# EAGLE board pi_zero_shield (EAGLE 9.6.2)
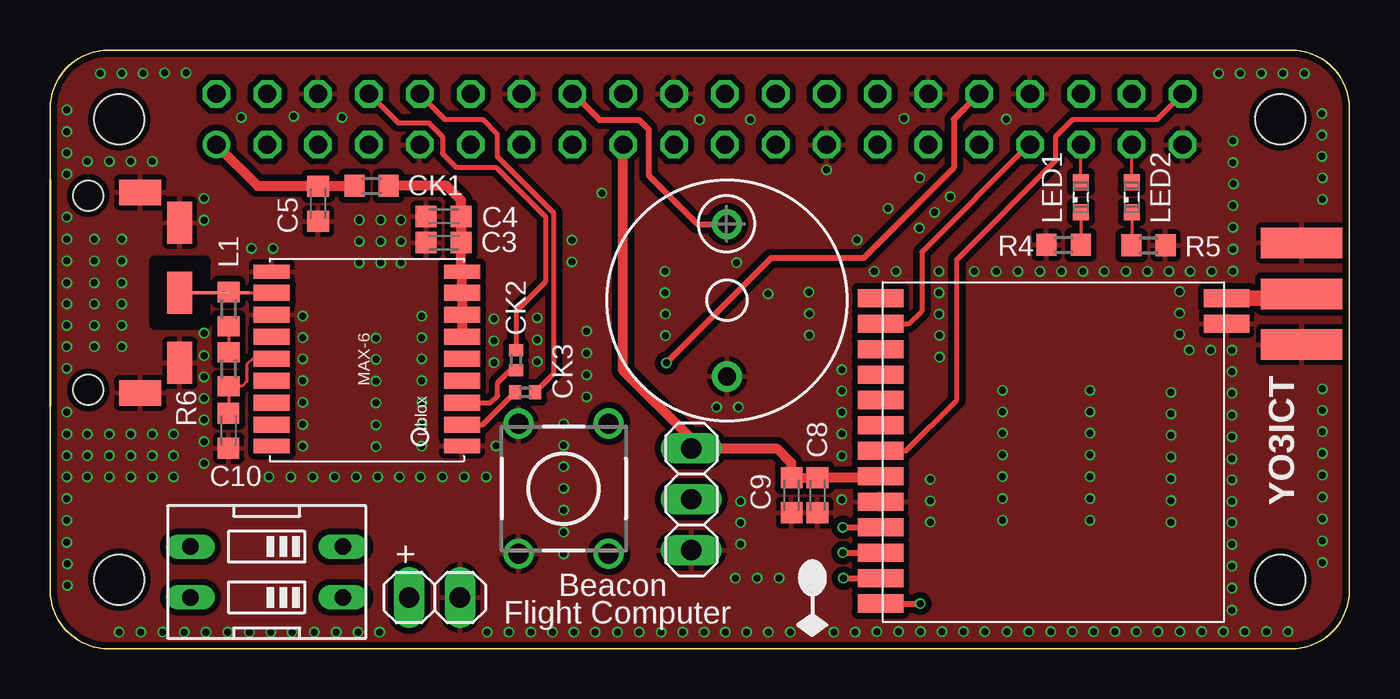
[diagram p0: board, top side]
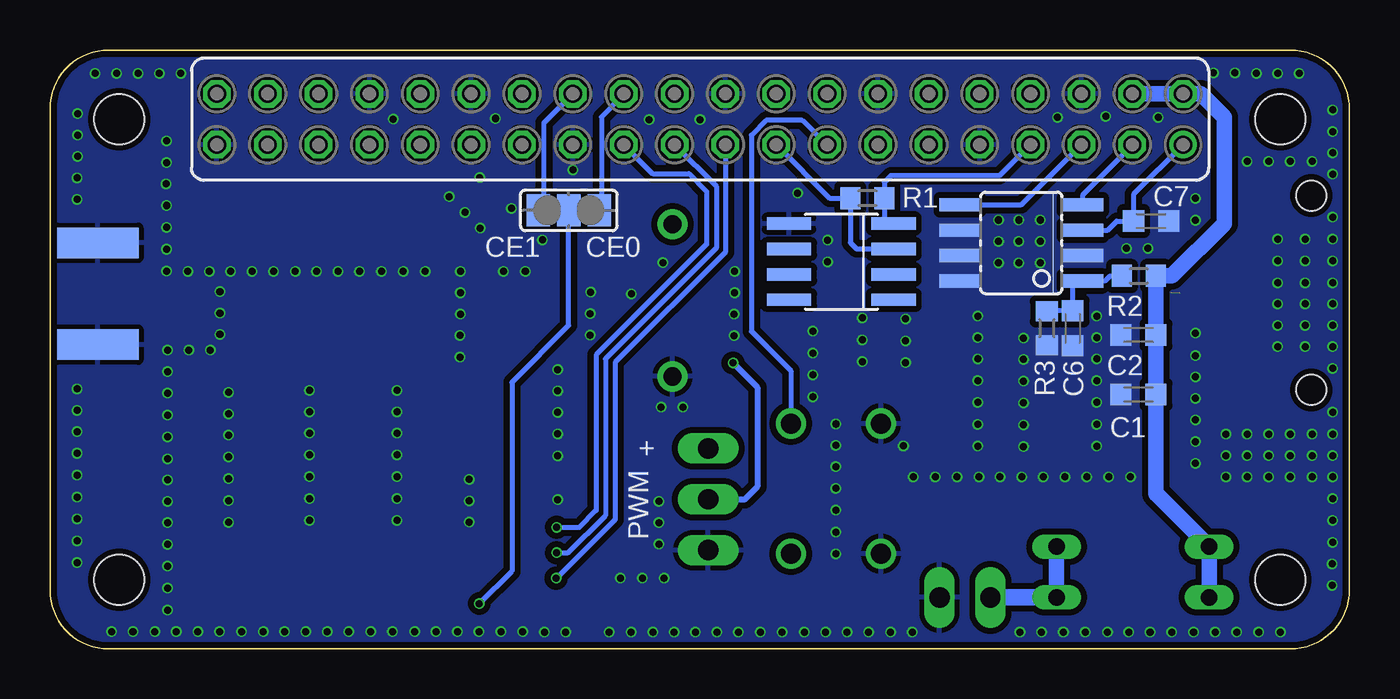
[diagram p1: board, bottom side, seen from below]

Size 64.9 x 29.9 mm. Coordinates in mm from the lower left corner, seen from the top.
Outline: 2.95,29.9 arc90 0,26.95 0,2.95 arc90 2.95,0 61.98,0 arc90 64.9,2.92 64.9,26.97 arc90 61.98,29.9 2.95,29.9
Copper layers (1*16): Top 0.035559375mm / dielectric 1.6mm / Bottom 0.035559375mm
Design rules "Arxterra-HLCpcb-2-layer-KW": minimum track width 6mil, minimum drill 0.3mm, track to track 6mil, track to pad 6mil, pad to pad 6mil, via to via 10mil, smd to smd 6mil, copper to edge 8mil, drill to drill 6mil, minimum pad ring 5mil, minimum via ring 3mil, stop-mask expansion 2.5mil, vias tented up to drill 25mil, thermal gap 10mil
Net classes: 0 default: width 0.152 mm, drill 0.305 mm, clearance 0.152 mm; 1 vcc: width 0.152 mm, clearance 0.152 mm
Holes 2.5 mm at 3.45,26.44 61.44,26.44 3.45,3.45 61.44,3.45

## Footprints (pad centres in the part's own frame; a part is rotated, then mirrored left to right if it is on the bottom)
1X02 = drill 1.016 long: 1 -1.27,0; 2 1.27,0
C0603K = smd 1.05 x 1.08: 1 -0.875,0; 2 0.875,0
SJ_2 = smd 1.168 x 1.6: 1 -1.524,0; 2 0,0; 3 1.524,0
R0603 = smd 1 x 1.1: 1 -0.85,0; 2 0.85,0
R0402 = smd 0.6 x 0.7: 1 -0.5,0; 2 0.5,0
SOIC08 = smd 0.66 x 2.032: 1 -1.905,-3.073; 2 -0.635,-3.073; 3 0.635,-3.073; 4 1.905,-3.073; 5 1.905,3.073; 6 0.635,3.073; 7 -0.635,3.073; 8 -1.905,3.073
SMA-EDGE = smd 1.524 x 4.064: GND@0 0,0; GND@1 5.08,0; SIG 2.54,0 | smd 1.524 x 4.064 bottom: GND@2 0,0; GND@3 5.08,0
1X03 = drill 1.016 long: 1 -2.54,0; 2 0,0; 3 2.54,0
SML0603 = smd 0.8 x 0.8: A 0.75,0; C -0.75,0
DTS-6 = drill 1: 1 -3.25,2.25; 2 3.25,2.25; 3 -3.25,-2.25; 4 3.25,-2.25
BMT1205XH7.5 = drill 0.9 pad 1.5: + 3.8,0; - -3.8,0
FE20-2 = drill 0.914: 1 -24.13,1.27 | drill 0.914 octagon: 2 -24.13,-1.27; 3 -21.59,1.27; 4 -21.59,-1.27; 5 -19.05,1.27; 6 -19.05,-1.27; 7 -16.51,1.27; 8 -16.51,-1.27; 9 -13.97,1.27; 10 -13.97,-1.27; 11 -11.43,1.27; 12 -11.43,-1.27; 13 -8.89,1.27; 14 -8.89,-1.27; 15 -6.35,1.27; 16 -6.35,-1.27; 17 -3.81,1.27; 18 -3.81,-1.27; 19 -1.27,1.27; 20 -1.27,-1.27; 21 1.27,1.27; 22 1.27,-1.27; 23 3.81,1.27; 24 3.81,-1.27; 25 6.35,1.27; 26 6.35,-1.27; 27 8.89,1.27; 28 8.89,-1.27; 29 11.43,1.27; 30 11.43,-1.27; 31 13.97,1.27; 32 13.97,-1.27; 33 16.51,1.27; 34 16.51,-1.27; 35 19.05,1.27; 36 19.05,-1.27; 37 21.59,1.27; 38 21.59,-1.27; 39 24.13,1.27; 40 24.13,-1.27
EDG-02 = drill 0.813 long: 1 -1.27,-3.81; 2 1.27,-3.81; 3 1.27,3.81; 4 -1.27,3.81
UBLOX_MAX-6 = smd 1.8 x 0.7: 1_GND 4.95,-4.4; 9_V_RESET 4.95,4.3; 10_GND -4.55,4.3; 18_RESERVED -4.55,-4.4 | smd 1.8 x 0.8: 2_TXD1 4.95,-3.35; 3_RXD1 4.95,-2.25; 4_TIMEPULSE 4.95,-1.15; 5_EXTINT0 4.95,-0.05; 6_V_BCKP 4.95,1.05; 7_VCC_IO 4.95,2.15; 8_VCC 4.95,3.25; 11_RF_IN -4.55,3.25; 12_GND -4.55,2.15; 13_ANTON -4.55,1.05; 14_VCC_RF -4.55,-0.05; 15_RESERVED -4.55,-1.15; 16_SDA2 -4.55,-2.25; 17_SCL2 -4.55,-3.35
LORA_DRF = smd 2.27 x 0.9: P$1 -8.609,7.497; P$2 -8.609,6.227; P$3 -8.608,4.958; P$4 -8.608,3.688; P$5 -8.609,2.417; P$6 -8.609,1.147; P$7 -8.608,-0.122; P$8 -8.608,-1.392; P$9 -8.61,-2.663; P$10 -8.61,-3.933; P$11 -8.609,-5.202; P$12 -8.609,-6.472; P$13 -8.609,-7.743; P$14 8.673,6.235; P$15 8.675,7.506
TAOGLAS.AP.10X.01 = smd 2.1 x 1.25: FP$1 0,0; GP$3 -3.5,0; GP$4 3.5,0 | smd 0.15 x 3: FP$2 0,-2 | smd 1.25 x 2.1: GP$1 -5.005,1.975; GP$2 5.005,1.975 | hole 1.5: -4.85,4.575; 4.85,4.575
DS18B20_SOIC = smd 0.61 x 2.21: DQ 1.905,-2.616; GND 1.905,2.616; NC -1.905,-2.616; NC2 -0.635,-2.616; NC3 -1.905,2.616; NC4 -0.635,2.616; NC5 0.635,2.616; VCC 0.635,-2.616

## Placement (x,y rotation side)
+  [1X02]  19.2,2.57 0 top
C1  100nF 0603  [C0603K]  10.54,12.7 180 bottom
C2  1uF 0603  [C0603K]  10.54,15.67 180 bottom
C3  10pF 0603 RF  [C0603K]  19.66,20.28 180 top
C4  100nF 0603  [C0603K]  19.66,21.59 180 top
C5  1uF 0603  [C0603K]  13.39,22.22 270 top
C6  100nF 0603  [C0603K]  13.82,16 270 bottom
C7  100nF 0603  [C0603K]  9.91,21.36 0 bottom
C8  100nF 0603  [C0603K]  38.33,7.67 270 top
C9  1uF 0603  [C0603K]  37.03,7.67 270 top
C10  10nF 0603  [C0603K]  8.92,10.9 270 top
CH_SEL  [SJ_2]  38.99,21.89 0 bottom
CK1  BLM18EG601SN1D  [R0603]  16.05,23.11 0 top
CK2  BLM15HD102SN1D  [R0402]  23.27,14.4 90 top
CK3  BLM15HD102SN1D  [R0402]  23.72,12.8 0 top
IC1  MCP3426_ignore pin names  [SOIC08]  16.38,20.27 90 bottom
J$2  SMA_EDGE  [SMA-EDGE]  62.51,15.19 90 top
JP1  [1X03]  32.03,7.47 90 top
L1  27nH 744786127A  [R0603]  8.92,16.97 90 top
LED1  [SML0603]  51.49,22.56 90 top
LED2  [SML0603]  54.03,22.56 90 top
R1  4k7 0603  [R0603]  24.08,22.5 0 bottom
R2  20k 0603  [R0603]  10.52,18.62 180 bottom
R3  10k 0603  [R0603]  15.11,16 270 bottom
R4  330 0603  [R0603]  50.62,20.17 0 top
R5  330 0603  [R0603]  54.86,20.14 180 top
R6  10 0603  [R0603]  8.92,13.97 90 top
S1  DTS-6  [DTS-6]  25.65,8 90 top
SG1  BUZZER  [BMT1205XH7.5]  33.81,17.4 90 top
SV1  [FE20-2]  32.44,26.44 180 bottom
SW1  [EDG-02]  10.82,3.84 90 top
U1  U1  [UBLOX_MAX-6]  15.62,14.53 0 top
U2  LORA  [LORA_DRF]  50.09,10.01 0 top
U$1  TAOGLAS.AP.10X.01  [TAOGLAS.AP.10X.01]  6.48,17.78 90 top
U$4  DS1820SOIC  [DS18B20_SOIC]  25.37,19.33 90 bottom

## Library data of the parts
+ JP1 = pinhead
C1-C10 = rcl; SPICEPREFIX: C
CH_SEL = jumper
CK1-CK3 L1 R1-R6 = rcl; SPICEPREFIX: R
IC1 = optocoupler; OC_FARNELL: unknown; OC_NEWARK: unknown
J$2 = SparkFun
LED1 LED2 = led
S1 = switch-tact
SG1 = buzzer; OC_FARNELL: unknown; OC_NEWARK: unknown
SV1 = con-lsta_new; OC_FARNELL: unknown; OC_NEWARK: unknown
SW1 = special
U1 U$4 = ava
U2 = lora
U$1 = ava; SPICEPREFIX: X

## Nets
3V3#1: C5.1 C7.1 CK1.1 IC1.3 SV1.1
3V3#2: C8.1 C9.1 JP1.3 R1.1 SV1.17 U2.P$8 U$4.VCC
5V_IN: C1.1 C2.1 R2.1 SV1.2 SV1.4 SW1.3 SW1.4
BUTTON: S1.4 SV1.15
BUZZER: SG1.+ SV1.16
CS0: CH_SEL.3 SV1.24
CS1: CH_SEL.1 SV1.26
DIO0: SV1.33 U2.P$2
DIO5: SV1.40 U2.P$7
DQ: R1.2 SV1.7 U$4.DQ
GND: +.2 C1.2 C2.2 C3.2 C4.2 C5.2 C6.2 C7.2 C8.2 C9.2 C10.2 IC1.2 IC1.6 IC1.7 IC1.8 J$2.GND@0 J$2.GND@1 J$2.GND@2 J$2.GND@3 JP1.1 R3.2 R4.1 R5.1 S1.1 S1.2 SG1.- SV1.6 SV1.9 SV1.14 SV1.20 SV1.25 SV1.30 SV1.34 SV1.39 U1.1_GND U1.10_GND U1.12_GND U2.P$9 U2.P$14 U$1.GP$1 U$1.GP$2 U$1.GP$3 U$1.GP$4 U$4.GND
GPS_RX/PI_TX: CK2.2 SV1.8
GPS_TX/PI_RX: CK3.2 SV1.10
LED1: LED1.A SV1.35
LED2: LED2.A SV1.37
MISO: SV1.21 U2.P$11
MOSI: SV1.19 U2.P$12
N$1: +.1 SW1.1 SW1.2
N$2: J$2.SIG U2.P$15
N$3: LED2.C R5.2
N$7: CK2.1 U1.3_RXD1
N$8: LED1.C R4.2
N$9: CK3.1 U1.2_TXD1
N$11: C10.1 R6.1 U1.14_VCC_RF
N$14: L1.2 U1.11_RF_IN U$1.FP$1 U$1.FP$2
N$15: C6.1 IC1.1 R2.2 R3.1
N$16: L1.1 R6.2
N$17: C3.1 C4.1 CK1.2 U1.6_V_BCKP U1.7_VCC_IO U1.8_VCC U1.9_V_RESET
NSS: CH_SEL.2 U2.P$13
PWM: JP1.2 SV1.32
SCK: SV1.23 U2.P$10
SCL: IC1.5 SV1.5
SDA: IC1.4 SV1.3

## Tracks (layer width: path | path; a pad name or v marks a point on that pad's centre or on a via)
3V3#1
  Top 0.152: C5.1 13.4,23.11 CK1.1
  Top 0.508: SV1.1 10.36,23.11 CK1.1
  Bottom 0.254: SV1.1 10.78,22.7 C7.1 11.62,21.36 12.08,20.9 IC1.3
3V3#2
  Top 0.508: SV1.17 28.63,13.89 32.03,10.49 JP1.3 36.3,10.01 37.01,9.3 37.01,8.57 C9.1 C8.1 41.41,8.55 U2.P$8
  Bottom 0.254: SV1.17 25.96,22.5 R1.1 24.93,20.28 24.61,19.96 U$4.VCC
5V_IN
  Bottom 0.762: SW1.4 SW1.3 | SV1.4 SV1.2 7.42,27.71 6.25,26.54 6.25,21.23 8.87,18.62 R2.1 C2.1 | C2.1 | C2.1 C1.1 9.67,7.76 9.64,7.73
  Bottom 0.813: 9.64,7.73 SW1.3
BUTTON
  Bottom 0.254: SV1.15 26.11,25.17 27.33,26.39 29.13,26.39 29.87,25.65 29.87,15.85 27.9,13.88 S1.4
BUZZER
  Top 0.305: SV1.16 26.14,27.71 27.43,26.42 29.41,26.42 29.9,25.93 29.9,23.65 32.34,21.2 SG1.+
CS0
  Bottom 0.254: SV1.24 36.25,27.66 37.36,26.54 37.36,22.43 37.31,22.38 37.31,22.05 CH_SEL.3
CS1
  Bottom 0.254: SV1.26 40.23,26.26 40.23,22.17 CH_SEL.1
DIO0
  Top 0.254: U2.P$2 42.9,16.23 43.54,16.87 43.54,19.81 48.9,25.17
  Top 0.305: 48.9,25.17 SV1.33
DIO5
  Top 0.254: U2.P$7 42.75,9.89 45.29,12.42 45.29,19.43 50.24,24.38 50.24,25.6 51.08,26.44 55.3,26.44 SV1.40
DQ
  Bottom 0.152: 23.23,21.53 23.52,21.23 U$4.DQ
  Bottom 0.254: SV1.7 17.48,23.62 22.91,23.62 23.23,23.3 R1.2 23.23,21.53
GND  (via drill 0.35)
  other vias: 50.52,18.85 51.59,18.85 49.44,18.85 48.35,18.85 47.26,18.85 52.65,18.85 46.16,18.85 55.98,10.67 55.98,11.73 55.98,9.59 55.98,8.5 55.98,7.4 55.98,12.8 55.98,6.31 51.05,0.86 52.12,0.86 49.97,0.86 48.88,0.86 47.79,0.86 53.19,0.86 43.97,6.32 43.97,7.39 43.97,8.46 56.41,17.83 56.41,16.76 56.41,15.7 63.55,10.85 63.55,11.91 63.55,9.77 63.55,8.67 63.55,7.58 63.55,12.98 63.55,6.49 63.55,22.44 63.55,23.52 58.6,0.86 59.66,0.86 57.52,0.86 56.43,0.86 55.33,0.86 54.24,0.86 63.53,26.72 63.53,25.65 63.53,24.59 63.55,5.4 63.55,4.31 44.42,14.57 44.42,15.65 44.4,18.85 44.4,17.78 44.4,16.71 62.65,28.73 61.57,28.73 58.37,28.73 59.44,28.73 60.5,28.73 44.55,0.86 45.62,0.86 43.47,0.86 42.38,0.86 41.29,0.86 46.69,0.86 58.01,18.85 54.81,18.85 55.88,18.85 53.73,18.85 56.95,18.85 57.96,14.91 56.9,14.91 59.03,14.91 47.57,10.77 47.57,11.84 47.57,9.69 47.57,8.6 47.57,7.51 47.57,12.9 47.57,6.41 51.94,10.77 51.94,11.84 51.94,9.69 51.94,8.6 51.94,7.51 51.94,12.9 51.94,6.41 42.65,26.48 47.75,26.45 59.08,25.36 59.08,24.28 59.11,23.22 44.17,21.79 44.96,22.58 43.41,21.01 41.86,22 40.31,20.42 42.25,18.85 41.16,18.85 39.55,11.81 39.55,12.88 39.55,10.73 39.55,9.64 39.55,13.94 39.55,7.45 31.6,0.84 32.66,0.84 30.52,0.84 29.43,0.84 28.33,0.84 33.73,0.84 39.14,0.84 40.21,0.84 36.97,0.84 35.88,0.84 34.79,0.84 25.1,0.84 26.16,0.84 24.02,0.84 22.92,0.84 21.83,0.84 27.23,0.84 43.43,23.53 12.17,26.58 9.55,26.53 34.29,19.28 35.86,17.73 37.92,15.66 37.92,16.74 37.9,17.81 30.73,15.63 30.73,16.71 30.71,18.85 30.71,17.78 34.38,12.07 33.29,12.07 16.46,0.84 15.38,0.84 14.29,0.84 13.2,0.84 9.96,0.84 11.02,0.84 8.88,0.84 7.79,0.84 12.09,0.84 6.71,0.84 5.63,0.84 4.53,0.84 3.44,0.84 25.65,9.09 25.65,10.16 25.65,8.01 25.65,6.92 25.65,5.83 25.65,11.23 25.65,4.74 32.44,26.43 34.98,26.43 38.79,23.91 6.79,28.75 5.71,28.75 2.51,28.73 3.58,28.73 4.65,28.73 34.49,5.23 34.49,6.3 34.49,7.37 27.56,22.76 0.84,15.09 0.84,16.15 0.84,14.01 0.84,11.82 0.84,17.22 0.84,23.7 0.84,21.55 0.84,20.46 0.84,19.37 0.84,18.28 0.84,8.59 0.84,9.65 0.84,7.51 0.84,6.41 0.84,5.32 0.84,10.72 0.86,3.18 0.86,4.24 0.84,24.76 0.84,26.91 0.84,25.82 18.57,14.48 18.57,15.54 18.57,13.4 18.57,12.31 18.57,11.21 18.57,10.12 15.29,8.59 14.21,8.59 13.12,8.59 12.03,8.59 10.93,8.59 4.04,8.59 5.11,8.59 2.96,8.59 1.87,8.59 6.17,8.59 17.45,8.59 16.37,8.59 22.28,10.13 14.58,26.53 26.8,15.86 26.8,14.77 26.8,13.68 26.8,12.59 22.17,16.47 22.17,15.38 22.17,14.29 12.62,14.48 12.62,15.54 12.62,13.4 12.62,12.31 12.62,11.21 12.62,10.12 17.53,20.35 17.53,21.41 17.53,19.27 15.44,20.35 15.44,21.41 15.44,19.27 16.51,20.35 16.51,21.41 16.51,19.27 10.06,19.99 11.14,19.99 3.58,15.09 3.58,16.15 3.58,17.22 3.58,20.46 3.58,19.37 3.58,18.28 2.21,15.09 2.21,16.15 2.21,17.22 2.21,20.46 2.21,19.37 2.21,18.28 59.03,6.3 59.03,7.37 59.03,5.22 59.03,4.13 59.03,3.04 59.03,8.43 59.03,13.84 59.03,12.76 59.03,11.67 59.03,10.58 59.03,9.49 59.03,1.93 60.76,0.86 61.82,0.86 59.08,22.14 59.08,21.04 59.08,19.95 59.08,18.86 24.33,16.52 21.78,8.59 20.69,8.59 19.6,8.59 18.5,8.59 34.23,3.53 35.32,3.53 36.41,3.53 7.7,11.43 7.7,10.35 7.7,9.26 7.7,12.51 7.7,14.64 4.04,9.65 5.11,9.65 2.96,9.65 1.87,9.65 6.17,9.65 4.04,10.72 5.11,10.72 2.96,10.72 1.87,10.72 6.17,10.72 4.04,24.33 5.11,24.33 2.96,24.33 1.87,24.33 7.7,15.76 7.7,13.58 7.7,22.49 7.7,21.4 24.33,15.43 24.33,14.34 26.06,20.41 26.06,19.32 12.62,16.61 18.57,16.61 16.28,14.45 16.28,15.52 16.28,13.37 16.28,12.28 16.28,11.19 16.28,10.1
  pour Top (isolate 0.305): -0.1,30.23 65.35,30.23 65.35,-0.74 -0.1,-0.74
  pour Bottom (isolate 0.305): -0.25,30.12 65.28,30.12 65.28,-0.61 -0.25,-0.61
  pour Bottom (isolate 0.305, no thermals): 7.49,22.89 7.49,10.95 8.43,10.01 21.46,10.01 21.62,10.16 21.62,22.53 20.95,23.19 7.8,23.19
GPS_RX/PI_TX
  Top 0.254: CK2.2 23.27,16.87 24.74,18.34 24.74,21.57 22.27,24.03 20.29,24.03 19.6,24.72 19.6,25.58 18.92,26.26 17.37,26.26 SV1.8
GPS_TX/PI_RX
  Top 0.254: 18.44,27.71 19.71,26.44 21.59,26.44 22.33,25.71 22.33,24.59 25.17,21.74 25.17,13.75 CK3.2
  Top 0.305: 18.44,27.71 SV1.10
LED1
  Top 0.152: LED1.A SV1.35
LED2
  Top 0.152: LED2.A SV1.37
MISO  (via drill 0.35)
  Top 0.305: v39.6,4.8 U2.P$11
  Bottom 0.254: SV1.21 31.62,23.09 31.62,20.02 37.16,14.48 37.16,6.66 39.01,4.8 v39.6,4.8
MOSI  (via drill 0.35)
  Top 0.305: v39.62,3.53 U2.P$12
  Bottom 0.254: SV1.19 31.17,19.81 36.68,14.3 36.68,6.45 39.6,3.53 v39.62,3.53
N$1
  Bottom 0.762: SW1.1 SW1.2
  Bottom 0.813: +.1 SW1.1
N$2
  Top 0.762: U2.P$15 62.36,17.51 J$2.SIG
N$3
  Top 0.152: LED2.C 54.03,20.15 R5.2
N$7
  Top 0.254: U1.3_RXD1 21.98,12.28 22.35,12.65 22.35,13.28 22.97,13.9 CK2.1
N$8
  Top 0.152: LED1.C 51.49,20.18 R4.2
N$9
  Top 0.254: U1.2_TXD1 21.6,11.18 CK3.1
N$11
  Top 0.152: C10.1 R6.1 9.59,13.12 9.83,13.36 9.83,14.2 10.11,14.48 U1.14_VCC_RF
N$14  (1 unrouted)
  Top 0.152: U1.11_RF_IN 8.95,17.78 L1.2 8.88,17.78 U$1.FP$1
N$15
  Bottom 0.254: IC1.1 13.28,18.39 | 13.28,18.39 12.18,18.39 11.95,18.62 R2.2 | 15.09,17 R3.1 15.09,16.88 C6.1 13.82,18.34 13.84,18.36 13.82,18.39 13.28,18.39
N$16
  Top 0.152: L1.1 R6.2
N$17
  Top 0.508: U1.6_V_BCKP U1.7_VCC_IO U1.8_VCC U1.9_V_RESET 20.53,18.86 C3.1 C4.1 20.53,22.39 19.81,23.11 CK1.2
NSS  (via drill 0.35)
  Top 0.305: U2.P$13 43.53,2.27 43.54,2.26 v43.46,2.26
  Bottom 0.254: v43.46,2.26 41.83,3.89 41.83,13.31 38.99,16.15 CH_SEL.2
PWM  (via drill 0.35)
  Top 0.305: SV1.32 45.14,26.44 45.14,24.03 40.62,19.51 36.02,19.51 v30.78,14.27
  Bottom 0.305: v30.78,14.27 29.57,13.06 29.57,8.1 30.2,7.47 JP1.2
SCK  (via drill 0.35)
  Top 0.305: v39.6,6.07 U2.P$10
  Bottom 0.254: SV1.23 34.8,23.72 32.99,23.72 32.11,22.83 32.11,20.19 37.62,14.68 37.62,6.91 38.46,6.07 v39.6,6.07
SCL
  Bottom 0.254: IC1.5 16.38,22.17 SV1.5
SDA
  Bottom 0.254: IC1.4 13.31,22.68 10.85,25.15 SV1.3

## Text on the board
tNames: YO3ICT | Beacon | Flight Computer
bNames: CE0 | CE1 | + | PWM